# Altium PCB single LED design PCB.PcbDoc
Units mm, origin at the board's own origin, x right, y up, seen from the top; angles counter-clockwise.
Board outline 45.3 x 36 mm, 2 copper layers (Top Layer, Bottom Layer); 39 components, 29 nets, 133 pads, 31 vias.
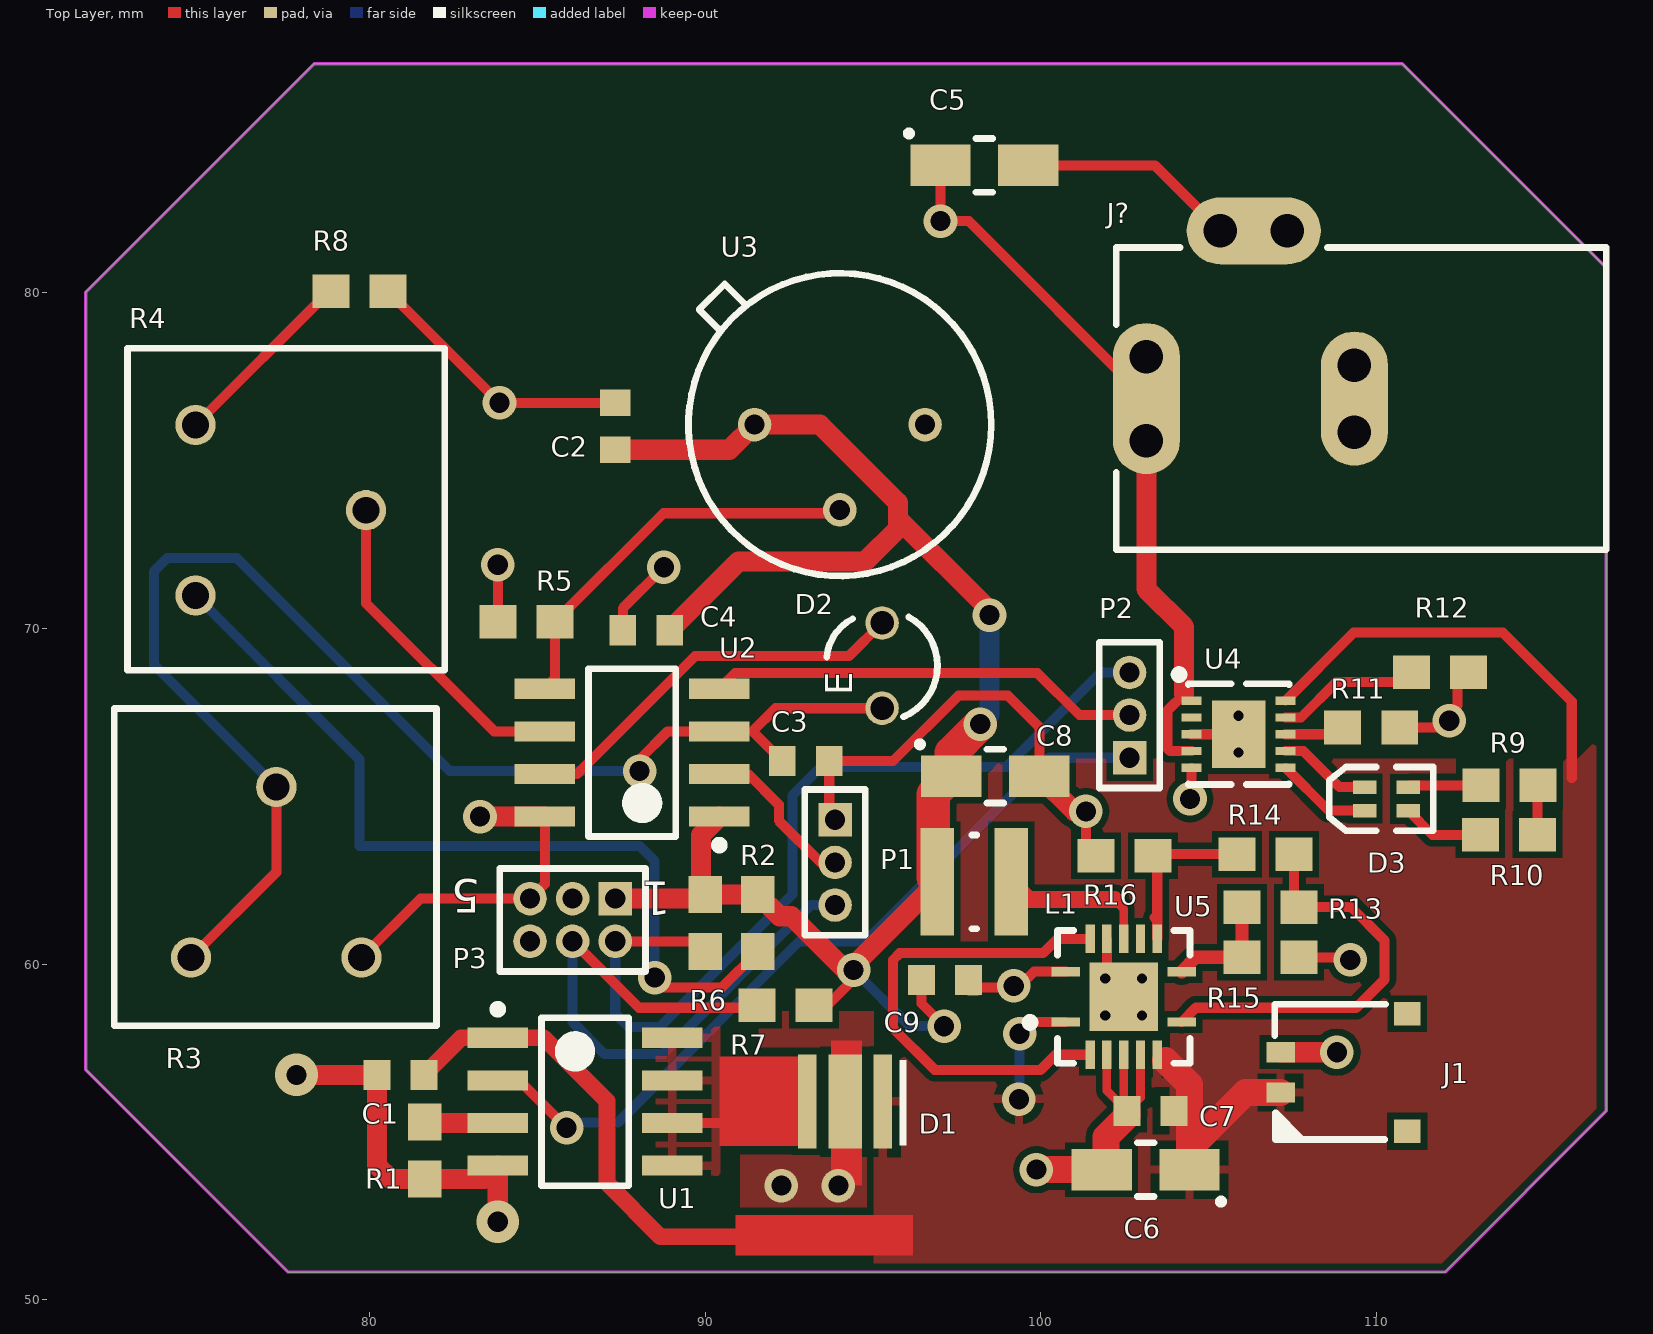
[diagram p0: Top Layer view]
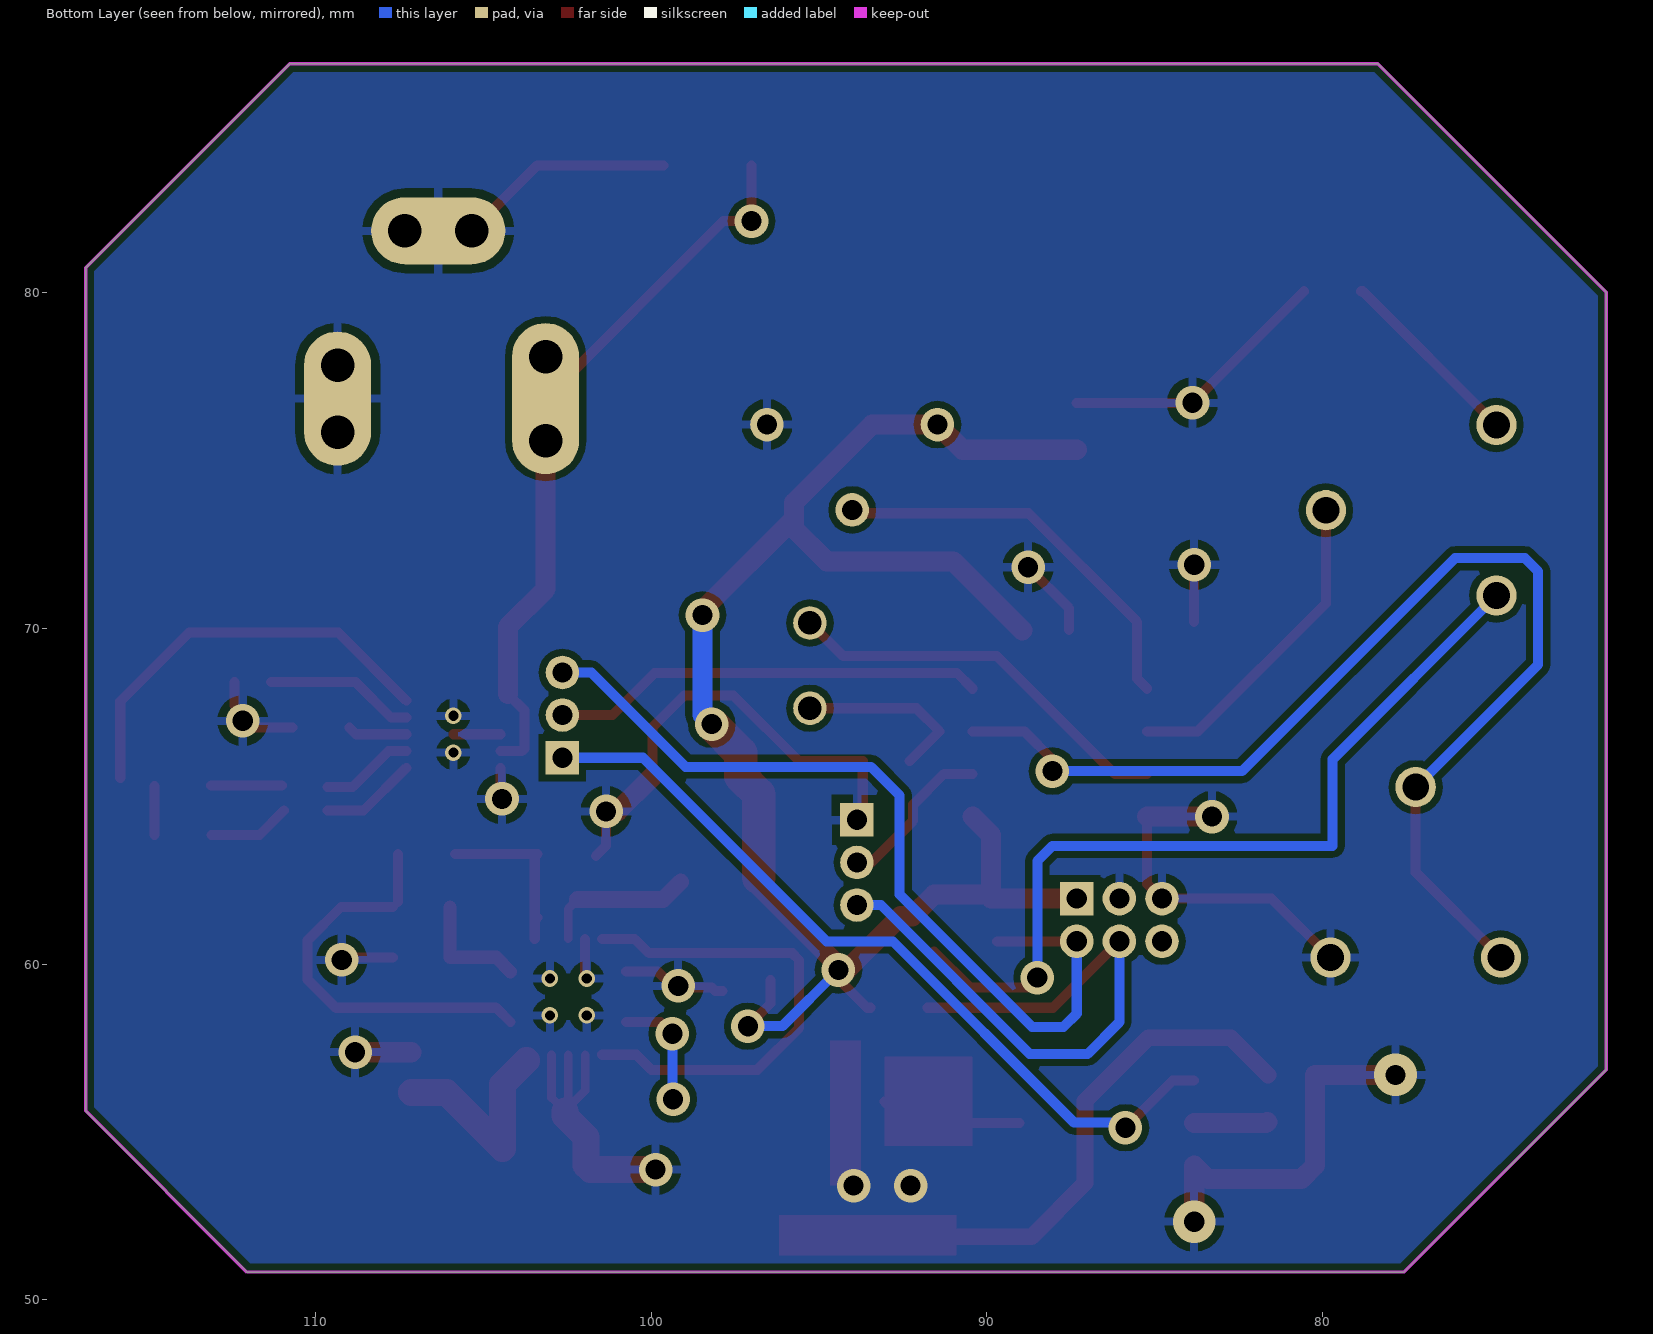
[diagram p1: Bottom Layer view, seen from below]

## Layer stack, top to bottom
Top Layer: signal copper 0.0356
Dielectric: dielectric 0.32, FR-4, Dk 4.8
Bottom Layer: signal copper 0.0356

## Board outline
78.35,86.825 71.55,80.025 71.55,56.85 77.575,50.825 112.05,50.825 116.85,55.625 116.85,80.75 110.775,86.825

## Design rules (kind name [scope] priority, off if disabled: settings)
Clearance [All] p1: gap=0.2
HoleSize [All] p1: absolutevalues=TRUE maxlimit=3 minlimit=0.6 maxpercent=80.000 minpercent=20.000
MinimumSolderMaskSliver [All] p1: minsoldermaskwidth=0.15
PlaneConnect [All] p1: planeconnectstyle=Relief reliefexpansion=0.508 reliefentries=4 reliefconductorwidth=0.4 reliefairgap=0.254
PolygonConnect [All] p1: connectstyle=Relief reliefconductorwidth=0.3 reliefentries=4 polygonreliefangle="90 Angle" airgapwidth=0.254
RoutingVias [All] p1: holewidth=2 width=1 viastyle="Through Hole" minholewidth=0.5 minwidth=0.5 maxholewidth=0.6 maxwidth=2
SilkToSilkClearance [All] p1: silktosilkclearance=0.2
SilkToSolderMaskClearance [IsPad] p1: minsilkscreentomaskgap=0.2 clearancetoexposedcopper=TRUE
SolderMaskExpansion [All] p1: expansion=0.06
Width [All] p1: maxlimit=1.6 minlimit=0.254 preferedwidth=0.4
23 further rules are at their usual default settings.

## Classes and differential pairs
component class "LED control circuit": C1 D1 R1 U1
component class "motion sensor circuit": C2 C3 C4 D2 P1 P2 P3 R2 R3 R4 R5 R6 R7 R8 U2 U3
component class "power management": C5 C6 C7 C8 C9 D3 J1 J? L1 R9 R10 R11 R12 R13 R14 R15 R16 U4 U5

## Components (designator, comment, footprint, x,y, rotation, side; value= is the part's Value field where it differs from the comment)
C1 "C0603C225K8PACTU" 1608[0603] 80.925,56.7 r0 top
C2 "C0603C105K8PACTU" 1608[0603] 87.325,76.025 r90 top
C3 "C0603C105K8PACTU" 1608[0603] 93,66.05 r0 top
C4 "C0603C225K8PACTU" 1608[0603] 88.25,69.95 r180 top
C5 "T491A104M035AT" A 98.325,83.8 r0 top
C6 "T491A226M010ZT" A 103.125,53.875 r180 top
C7 "C0603C105K8PACTU" 1608[0603] 103.275,55.625 r180 top
C8 "T491A336K010AT" A 98.65,65.6 r0 top
C9 "C0603C105K8PACTU" 1608[0603] 97.15,59.525 r0 top
D1 "LUW CR7P" "LUW CR7P" 94.175,55.9 r270 top
D2 "TEFT4300" LED 95.275,67.625 r90 top
D3 "HSMF-C165" 1.6X0.8X0.5 110.3,64.925 r180 top
J1 "DF57H-2P-1.2V(21)" DF57H-2P-1.2V(21) 111.325,58.175 r90 top
J? "PWR2.5" KLD-0202 116.85,76.85 r180 top
L1 "744029100" WE-TPC 98.025,62.45 r180 top
P1 "MHDR1X3" MHDR1X3 93.875,64.3 r270 top
P2 "MHDR1X3" MHDR1X3 102.65,66.15 r90 top
P3 "MHDR2X3" MHDR2X3 87.325,61.95 r180 top
R1 "ERJ-3GEYJ912V" 3-0603 81.65,54.45 r90 top
R2 "ERJ-3GEYJ332V" 3-0603 91.575,61.225 r90 top
R3 "3386F-1-502" 3386F 77.225,65.275 r180 top
R4 "3386F-1-502" 3386F 79.9,73.525 r90 top
R5 "ERJ-3GEYJ473V" 3-0603 84.675,70.2 r0 top
R6 "ERJ-3GEYJ103V" 3-0603 90,61.225 r90 top
R7 "ERJ-3GEYJ103V" 3-0603 92.4,58.775 r0 top
R8 "ERJ-3GEYJ331V" 3-0603 79.7,80.05 r180 top
R9 "ERJ-3GEYJ471V" 3-0603 113.975,65.325 r0 top
R10 "ERJ-3GEYJ471V" 3-0603 113.95,63.85 r0 top
R11 "ERJ-3GEYJ502V" 3-0603 109.85,67.05 r180 top
R12 "ERJ2GEJ103X" 3-0603 111.9,68.7 r180 top
R13 "CRCW06031M65FKEA" 3-0603 106.85,61.7 r0 top
R14 "CRCW06031M47FKEA" 3-0603 106.7,63.275 r0 top
R15 "ERJ-3GEYJ105V" 3-0603 106.85,60.2 r180 top
R16 "ERJ-3GEYJ105V" 3-0603 102.5,63.225 r0 top
U1 "MIC4801" SOIC-8N 86.425,55.9 r0 top
U2 "Z8FS040BSB20EG" SOIC127P600X173-8N 87.825,66.3 r180 top
U3 "RE200B-P" RE200B-P 91.475,76.075 r0 top
U4 "LM3658" WSON10 105.9,66.85 r0 top
U5 "TPS627367" QFN50P350X350X100_HS-15N 102.475,59.025 r0 top

## Footprints (in the part's own frame and the unit in brackets; to place one, negate y for a bottom-side part, rotate by r counter-clockwise, add the part's x,y. Pads: shape width x height; smd on the part's side, far side on the other; paste and mask are expansions set on the pad)
1.6X0.8X0.5 [mm] "SM LED, Bi-Colour; 4 Flat Leads; Body 1.6 x 0.8 x 0.5 mm (LxWxH)"
  rect 0.7x0.4 smd: 1(-0.65,0.35) 2(-0.65,-0.35) 3(0.65,0.35) 4(0.65,-0.35)
  silkscreen extent -1.4,-0.95 1.7,0.95
3-0603 [mm] "Chip Resistor; Body 1.6 x 0.9 mm (LxW typ)"
  rect 1.1x1 smd: 1(-0.85,0) 2(0.85,0)
1608[0603] [mm] "Chip Capacitor, Body 1.6x0.8mm, IPC High Density"
  rect 0.8x0.9 smd: 1(-0.7,0) 2(0.7,0)
  body extent -0.87,-0.48 0.87,0.48, height 1.3
3386F [mm]
  round 1.2 hole 0.8: 1(-2.54,5.08) 2(0,0) 3(2.54,5.08)
  silkscreen extent -4.77,-2.34 4.83,7.11, body extent -4.77,-2.34 4.83,7.11, height 4.83
A [mm] "Capacitor, SM Tantalum; Body 3.2 x 1.6 mm (LxW typ)"
  rect 1.8x1.23 smd: 1(-1.31,0) 2(1.31,0)
  silkscreen extent -2.33,-0.8 0.25,1.03, body extent -1.6,-0.8 1.6,0.8, height 1.6
DF57H-2P-1.2V(21) [mm] "connector, 2-Leads, Body 4.10x4.35mm, IPC Medium Density"
  rect 0.6x0.85 smd: 1(-2,4.175) 2(-0.8,4.175)
  rect 0.7x0.8 smd mask+0.05: 3(-3.15,0.4) 4(0.35,0.4)
  silkscreen extent -3.4,1.05 0.63,4.35, body extent -3.45,0 0.65,4.35, height 1.4
KLD-0202 [mm] "DC Power Jack, 2.5mm, KLD Series, PCB Mount"
  oval 2x4.5 all layers, no hole: 1(13.7,0)
  round 1.5 hole 1: 1A(13.7,-1.25) 1B(13.7,1.25) 2A(7.5,-1) 2B(7.5,1) 3A(9.5,-5) 3B(11.5,-5)
  oval 2x4 all layers, no hole: 2(7.5,0)
  oval 4x2 all layers, no hole: 3(10.5,-5)
  silkscreen extent 0,-4.5 14.6,4.5
LED [mm] "2.54mm pitch, through-hole"
  round 1 hole 0.7: 1(2.54,0) 2(0,0)
  silkscreen extent -0.25,-1.65 2.72,1.65
"LUW CR7P" [mm]
  rect 2.8x0.55 smd: 1(0,1.125) 2(0,-1.125)
  rect 2.8x1 smd: 3(0,0)
  silkscreen extent -1.25,1.63 1.3,1.83, body extent -1.5,-1.5 1.5,1.5, height 1.6
MHDR1X3 [mm] "Connector; Header; 3 Position"
  rect 1x1 hole 0.6: 1(0,0)
  round 1 hole 0.6: 2(1.27,0) 3(2.54,0)
  silkscreen extent -0.9,-0.9 3.44,0.9
MHDR2X3 [mm] "Connector; Header; 3x2 Position"
  rect 1x1 hole 0.6: 1(0,0)
  round 1 hole 0.6: 2(0,1.27) 3(1.27,0) 4(1.27,1.27) 5(2.54,0) 6(2.54,1.27)
  silkscreen extent -0.9,-0.9 3.44,2.17
QFN50P350X350X100_HS-15N [mm] "QFN, 14-Leads, Body 3.50x3.50mm, Pitch 1.50mm/0.50mm, Thermal Pad 2.05x2.05mm, IPC Medium Density"
  rect 0.85x0.28 smd mask+0.07: 1(-1.725,-0.75) 7(1.725,-0.75) 8(1.725,0.75) 14(-1.725,0.75)
  rect 0.28x0.85 smd mask+0.07: 2(-1,-1.725) 3(-0.5,-1.725) 4(0,-1.725) 5(0.5,-1.725) 6(1,-1.725) 9(1,1.725) 10(0.5,1.725) 11(0,1.725) 12(-0.5,1.725) 13(-1,1.725)
  rect 2.05x2.05 smd: 15(0,0)
  silkscreen extent -2.92,-1.97 1.97,1.97, body extent -1.83,-1.83 1.83,1.83, height 1
RE200B-P [mm]
  round 1 hole 0.6: 1(0,0) 2(2.54,-2.54) 3(5.08,0)
  silkscreen extent -1.97,-4.51 7.05,4.51, body extent -2.03,-4.44 7.05,4.44, height 4.5
SOIC127P600X173-8N [mm] "SOIC, 8-Leads, Body 4.88x3.90mm, Pitch 1.27mm, IPC Medium Density"
  rect 1.8x0.6 smd: 1(-2.6,1.905) 2(-2.6,0.635) 3(-2.6,-0.635) 4(-2.6,-1.905) 5(2.6,-1.905) 6(2.6,-0.635) 7(2.6,0.635) 8(2.6,1.905)
  silkscreen extent -2.73,-2.5 1.3,2.88, body extent -2,-2.5 2,2.5, height 1.73
SOIC-8N [mm] "SOIC, 8-Leads, Body 4.88x3.90mm, Pitch 1.27mm, IPC Medium Density"
  rect 1.8x0.6 smd: 1(-2.6,1.905) 2(-2.6,0.635) 3(-2.6,-0.635) 4(-2.6,-1.905) 5(2.6,-1.905) 6(2.6,-0.635) 7(2.6,0.635) 8(2.6,1.905)
  silkscreen extent -2.72,-2.5 1.3,2.88, body extent -2,-2.5 2,2.5, height 1.73
WE-TPC [mm] "Precision Wire Wound Inductor, SMD, 2-Leads, Body 2.70x2.70mm, IPC Medium Density"
  rect 1x3.2 smd: 1(-1.1,0) 2(1.1,0)
  silkscreen extent -0.08,-1.4 0.07,1.4, body extent -1.4,-1.4 1.4,1.4, height 1.35
WSON10 [mm] "WSON, 10-Leads, Body 3.00x3.00mm, Pitch 0.50mm, Thermal Pad 2.00x1.60mm, IPC Medium Density"
  rect 0.6x0.25 smd mask+0.05: 1(-1.4,1) 2(-1.4,0.5) 3(-1.4,0) 4(-1.4,-0.5) 5(-1.4,-1) 6(1.4,-1) 7(1.4,-0.5) 8(1.4,0) 9(1.4,0.5) 10(1.4,1)
  rect 1.6x2 smd: 11(0,0)
  silkscreen extent -1.9,-1.5 1.5,1.9, body extent -1.5,-1.5 1.5,1.5, height 0.8

## Part data
C1 C2 C3 C4 C7 C9: library part C0603, "Ceramic Chip Capacitor - Standard"
C5: library part T491A, "Tantalum Chip Capacitor, 0.1uF, 35V, 20%, package 1206,  T491 Series"
C6: library part T491A, "Tantalum Chip Capacitor, 22uF, 10V, 20%, package 1206,  T491 Series"
C8: library part T491A, "Tantalum Chip Capacitor, 33uF, 10V, 20%, package 1206,  T491 Series"
D1: "High birghtness white LED, SMD, 150lm, 80 degree"
D2: "Silicon NPN Phototransistor"
D3: "Miniature Bi-Colour Surface Mount Chip LED (Red/Green)"
J1: "low profile connector, 1.2mm pitch, SMD, 2 pin"
J?: "Low Voltage Power Supply Connector"
L1: "SMD power inductor, 10uH, .75A"
P1 P2: "Header, 3-Pin"
P3: "Header, 3-Pin, Dual row"
R1 R2 R5 R6 R7 R8 R9 R10 R11 R13 R14 R15 R16: library part ERJ3EK, "Precision Thick Film Chip Resistor, 10 Ohm to 1M Ohm Range, 1% and 0.5% Tolerance, 0603 Size, 0.063 W"
R3 R4: library part 3386F-1-XXX, "3386 - 3/8 ” Square Trimpot Trimming Potentiometer"
R12: library part ERJ2GE, "Thick Film Chip Resistor, 10k Ohm Range, 5% Tolerance, 0402 Size, 0.063 W"
U1: "WLED driver, 600mA, linear LDO, constant current"
U2: "8-bit Microcontrollers - MCU ZMotion MCU Mot Det IC, 4KB Flash"
U3: "Pyroelectric Passive Infrared Sensor"
U4: "Dual Source USB/AC Li Chemistry Charger IC"
U5: library part TPS62737, "ultra-low power buck converter, 50/200mA, enable pin"

## Via types
v1: diameter 1, hole 0.6, Top Layer to Bottom Layer, 23 vias
v2: diameter 0.5, hole 0.3, Top Layer to Bottom Layer, 6 vias
v3: diameter 1.27, hole 0.6, Top Layer to Bottom Layer, 2 vias

## Nets (pads, with @x,y where several pads share a name; then routed paths per layer and width w, separated by ;. In a path a pad name is that pad's centre, name@x,y a point inside that pad or via, vN(x,y) a via of type N, cw(c..) or ccw(c..) an arc to the next point about the centre after c; other vN are vias at no path point)
AMBIENT_LIGHT_SENS: C3.1 D2.2 R3.2 R3.3 U2.3 | length 39.8
  Top Layer w0.3: R3.3 77.225,62.735 R3.2 ; v1(88.05,65.75) 88.05,66.1 88.885,66.935 U2.3 ; C3.1 91.415,66.935 92.105,67.625 D2.2
  Bottom Layer w0.3: R3.2 73.575,68.925 73.575,71.7 73.975,72.1 76.05,72.1 82.4,65.75 v1(88.05,65.75)
DBG/PA0: P1.3 P3.4 R7.1 | length 19
  Top Layer w0.3: P3.4 88.035,58.7 R7.1@91.775,58.7
  Bottom Layer w0.3: P3.4 86.055,58.27 87,57.325 88.725,57.325 93.16,61.76 P1.3
DBG/PA2: P2.3 P3.2 R6.1 | length 26.1
  Top Layer w0.3: P3.2 R6.1@89.695,60.68
  Bottom Layer w0.3: P3.2 87.325,58.525 87.725,58.125 88.65,58.125 92.6,62.075 92.6,65.025 93.45,65.875 98.975,65.875 101.79,68.69 P2.3
GND: C1.1 C2.2 C3.2 C4.2 C5.2 C6.2 C7.2 C8.2 C9.2 D1.3 J1.2 J?.2 J?.2A J?.2B J?.3 J?.3A J?.3B P1.1 P3.3 P3.5 R1.1 R3.1 R5.1 R8.1 R11.1 R12.1 R15.1 R16.1 U1.4 U2.8 U3.3 U4.3 U4.5 U4.11 U5.3 U5.4 U5.5 U5.12 U5.14 U5.15 | length 75.1
  Top Layer w0.254: C6.2 C6.2@101.945,54.005 ; U5.3 101.975,56.225 C7.2@102.475,55.725 ; U5.4 C7.2@102.475,55.725 ; U5.5 102.975,56.025 C7.2 C7.2@102.475,55.725
  Top Layer w0.3: R3.1 81.52,61.95 P3.5 85.225,62.39 U2.8 ; R8.1 v1(83.875,76.725) C2.2 ; R5.1 v1(83.825,71.9) ; C4.2 87.55,70.6 v1(88.775,71.825) ; P1.1 93.7,64.475 C3.2 95.6,66.05 97.55,68 99.025,68 99.96,67.065 C8.2 ; C9.2@97.875,59.2 98.1,59.2 98.2,59.3 99.325,59.3 99.8,59.775 U5.14 ; C5.2 103.4,83.8 J?.3B ; v1(101.35,64.55) 101.35,63.525 R16.1 ; U5.15@101.975,59.525 U5.12 ; v1@104.5,65.275 U4.5 ; U4.3 U4.11 ; R15.1 v1@109,60.2 ; R11.1 111.775,67.05 112.425,67.7 R12.1@112.425,68.4
  Top Layer w0.6: v3(77.825,56.7) C1.1 80.225,54 80.625,53.6 R1.1 83.43,53.6 U1.4 v3(83.825,52.325) ; v1(83.295,64.395) U2.8 ; C8.2 101.01,64.55 v1(101.35,64.55) ; J1.2 v1(108.825,57.375)
  Top Layer w0.8: v1(99.875,53.875) C6.2 ; C6.2@101.945,54.005 101.945,54.845 102.575,55.475 C7.2
  other v1: 92.275,53.4 93.975,53.4 99.2,59.35 109.225,60.125 104.45,64.925 112.175,67.25
  other v2: 101.925,58.475 103.025,58.475 101.925,59.575 103.025,59.575 105.9,66.3 105.9,67.4
LED_CONTROL: P2.1 U1.2 | length 23.8
  Top Layer w0.3: U1.2 84.465,56.535 v1(85.875,55.125)
  Bottom Layer w0.3: v1@86,55.275 87.4,55.275 92.8,60.675 94.775,60.675 100.25,66.15 P2.1
NetC5_1: C5.1 J?.1 J?.1A J?.1B U4.1 U4.4 | length 21.8
  Top Layer w0.3: C5.1 v1(97.015,82.14) 97.86,82.14 J?.1 ; 104.275,68.05 103.775,67.55 103.775,66.425 103.85,66.35 U4.4
  Top Layer w0.6: J?.1 J?.1B 103.15,71.175 104.275,70.05 104.275,68.05
NetD1_2: D1.2 U1.5 U1.6 U1.7 U1.8 | length 4.3
  Top Layer w0.3: U1.6 92.415,55.265 D1.2
NetD2_1: D2.1 U2.7 | length 11.9
  Top Layer w0.3: U2.7 86.19,65.665 89.7,69.175 94.285,69.175 D2.1
NetD3_1: D3.1 R10.1 | length 2.5
  Top Layer w0.3: D3.1 111.675,63.85 R10.1
NetD3_2: D3.2 R9.1 | length 2.1
  Top Layer w0.3: D3.2@111,65.325 R9.1
NetD3_3: D3.3 U4.6 | length 2.9
  Top Layer w0.3: U4.6 108.575,64.575 D3.3
NetD3_4: D3.4 U4.7 | length 2.8
  Top Layer w0.3: U4.7 107.825,66.35 108.9,65.275 D3.4
NetL1_1: L1.1 U5.11 | length 4.6
  Top Layer w0.254: 102.2,61.925 102.475,61.65 U5.11
  Top Layer w0.5: L1.1 99.65,61.925 102.2,61.925
NetP1_2: P1.2 U2.2 | length 4.8
  Top Layer w0.3: U2.2 91.285,65.665 92.2,64.75 92.2,64.275 93.445,63.03 P1.2
NetP2_2: P2.2 U2.4 | length 12.9
  Top Layer w0.3: U2.4 90.895,68.675 99.9,68.675 101.155,67.42 P2.2
NetR1_2: R1.2 U1.3 | length 2.2
  Top Layer w0.6: R1.2 81.685,55.265 U1.3
NetR2_1: R2.1 R4.1 | length 25.3
  Top Layer w0.3: v1@88.675,59.425 88.8,59.3 90.5,59.3 R2.1
  Bottom Layer w0.3: R4.1 79.7,66.105 79.7,63.525 88.05,63.525 88.5,63.075 v1(88.5,59.6)
NetR4_2: R4.2 U2.6 | length 9.7
  Top Layer w0.3: R4.2 79.9,70.75 83.715,66.935 U2.6
NetR4_3: R4.3 R8.2 | length 5.7
  Top Layer w0.3: R4.3 78.805,80.05 R8.2
NetR5_2: R5.2 U2.5 U3.2 | length 11.9
  Top Layer w0.3: U2.5 85.525,68.505 R5.2 88.76,73.435 U3.2@94.015,73.435
NetR11_2: R11.2 U4.8 | length 1.8
  Top Layer w0.3: U4.8 108.8,66.85 R11.2
NetR12_2: R12.2 U4.9 | length 4.5
  Top Layer w0.3: U4.9 107.755,67.35 108.805,68.4 R12.2@111.325,68.4
NetR13_1: R13.1 R15.2 U5.8 | length 3.5
  Top Layer w0.4: U5.8 104.625,60.2 R15.2 R13.1
NetR13_2: R13.2 R14.2 U5.7 | length 12.1
  Top Layer w0.3: U5.7 104.625,58.7 109.4,58.7 110.25,59.55 110.25,60.7 109.25,61.7 R13.2 ; R13.2@107.55,61.85 R14.2
NetR14_1: R14.1 R16.2 U5.9 | length 5.7
  Top Layer w0.3: 103.4,61.385 103.465,61.32 U5.9@103.465,60.76 ; U5.9 103.475,63.2 103.4,63.275 R14.1
NetU5_2: U5.2 U5.13 | length 14.7
  Top Layer w0.3: U5.2 100.45,57.3 100,56.85 96.842,56.85 95.6,58.092 95.6,60.125 95.8,60.325 100.073,60.325 100.498,60.75 U5.13
VBAT_P3V7: C1.2 C6.1 C7.1 D1.1 J1.1 U1.1 U4.10 U5.1 U5.6 | length 36.2
  Top Layer w0.3: v1(99.375,57.925) 99.725,58.275 U5.1 ; U4.10 109.325,69.875 113.775,69.875 115.825,67.825 115.825,65.55
  Top Layer w0.5: C1.2 82.73,57.805 U1.1 85.195,57.805 87.075,55.925 87.075,53.475 88.675,51.875 91.225,51.875
  Top Layer w0.8: 103.725,57.125 104.435,56.415 104.435,54.51 106.1,56.175 J1.1
  Bottom Layer w0.3: v1(99.35,55.975) 99.375,56 v1(99.375,57.925)
VCC_P3V3: C2.1 C4.1 C8.1 C9.1 L1.2 P3.1 R2.2 R6.2 R7.2 U2.1 U3.1 | length 51.8
  Top Layer w0.3: R7.2@93.475,58.7 93.575,58.7 v1@94.625,59.75 ; C9.1 96.45,58.825 v1(97.125,58.15)
  Top Layer w0.6: P3.1 R6.2@89.875,61.95 ; C2.1 90.725,75.325 U3.1 93.425,76.075 95.75,73.75 95.75,73.275 ; C4.1 91,72 94.775,72 95.75,72.975 95.75,73.275 ; R6.2@89.875,62.075 89.875,63.845 U2.1 ; R6.2 R2.2 92.225,61.425 92.575,61.425 94.175,59.825 v1(94.425,59.825) 94.425,59.95 L1.2 ; v1(98.475,70.4) 98.475,70.55 95.75,73.275
  Top Layer w1: L1.2@96.8,62.575 96.8,65.06 C8.1 97.34,66.29 v1(98.2,67.15)
  Bottom Layer w0.3: v1(94.425,59.825) 96.1,58.15 v1(97.125,58.15)
  Bottom Layer w0.6: v1(98.2,67.15) 98.475,67.425 v1(98.475,70.4)
VCC_USB_VBUS_P5V0: R9.2 R10.2 | length 1.5
  Top Layer w0.3: R10.2 R9.2@114.8,65.3
pads on no net: J1.3 J1.4 P3.6 U4.2 U5.10

## Polygon pours and split planes (outlines as drawn)
GND on Top Layer "Top Layer-No Net" (solid, pour order 6): 96.2,52.75 91.05,52.75 91.05,54.325 93.55,54.325 93.55,57.5 93.525,57.525 91.6,57.525 91.6,58.6 95.025,58.6 95.025,57.55 94.65,57.55 94.65,54.325 96.2,54.325
NetD1_2 on Top Layer "Top Layer-No Net" (solid, pour order 4): 88.45,58.17 88.525,58.081 88.525,53.714 90.25,53.714 90.325,53.625 90.45,53.774 90.45,58.2 90.45,58.141
VBAT_P3V7 on Top Layer "Bottom Layer-No Net" (solid, remove dead copper, pour order 2): 95.025,50.975 95.025,62.025 94.9,62.15 98.875,66.125 101.525,66.125 116,66.125 116.55,66.675 116.55,55.875 116.55,55.575 111.775,50.8
GND on Bottom Layer "Bottom Layer-No Net" (solid, remove dead copper, pour order 6): 69.35,88.175 69.075,87.9 69.075,49.975 115,49.975 115.275,50.25 118,52.975 118,84.775 118,85.35 112.825,90.525 111.7,89.4 69.35,89.4

## Keep-outs
Keep-Out Layer:
  the board outline again, w0.1

## Other copper
Top Layer:
  rectangle net GND: 93.75,53.4 94.675,57.725
  rectangle net NetD1_2: 90.425,54.575 93.05,57.25
  rectangle net VBAT_P3V7: 90.9,51.325 96.2,52.525

## Text inside footprints (layer, text, board x,y; h text height)
D2: Top Overlay "E" at 94.386,68.006 h0.8 r90
J?: Mechanical 1 "Alert PCB fab to slot details" at 116.564,70.784 h0.3 r180; Mechanical 1 "Assign keep-out area to slot" at 116.564,70.284 h0.3 r180; Mechanical 1 "Mech 1 - Slot cut-out" at 116.564,71.284 h0.3 r180; Mechanical 1 "Mech 2 - Clearance, move to internal plane if present" at 116.564,71.784 h0.3 r180
P3: Top Overlay "1" at 88.975,62.45 h1 r180; Top Overlay "5" at 83.3,62.525 h1 r180